# Altium PCB MicroMod_SAMD51.PcbDoc
Units mil, origin at the board's own origin, x right, y up, seen from the top; angles counter-clockwise.
Board outline 866.14 x 866.14 mil, 4 copper layers (Top, PWR_HORIZ, GND-VERT, Bottom), stack 83.073 mil thick; 36 components, 57 nets, 184 pads, 112 vias.
Unrouted connection lines stored in the file: 57.
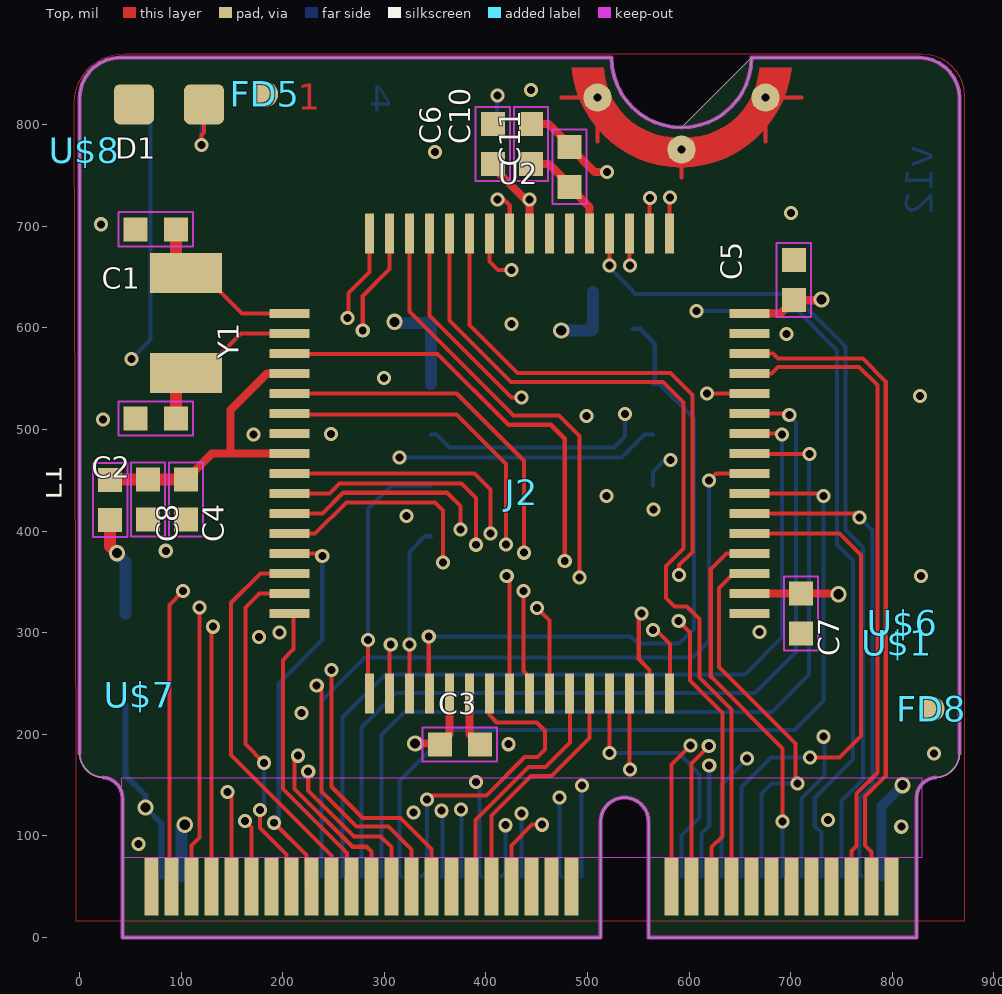
[diagram p0: Top view]
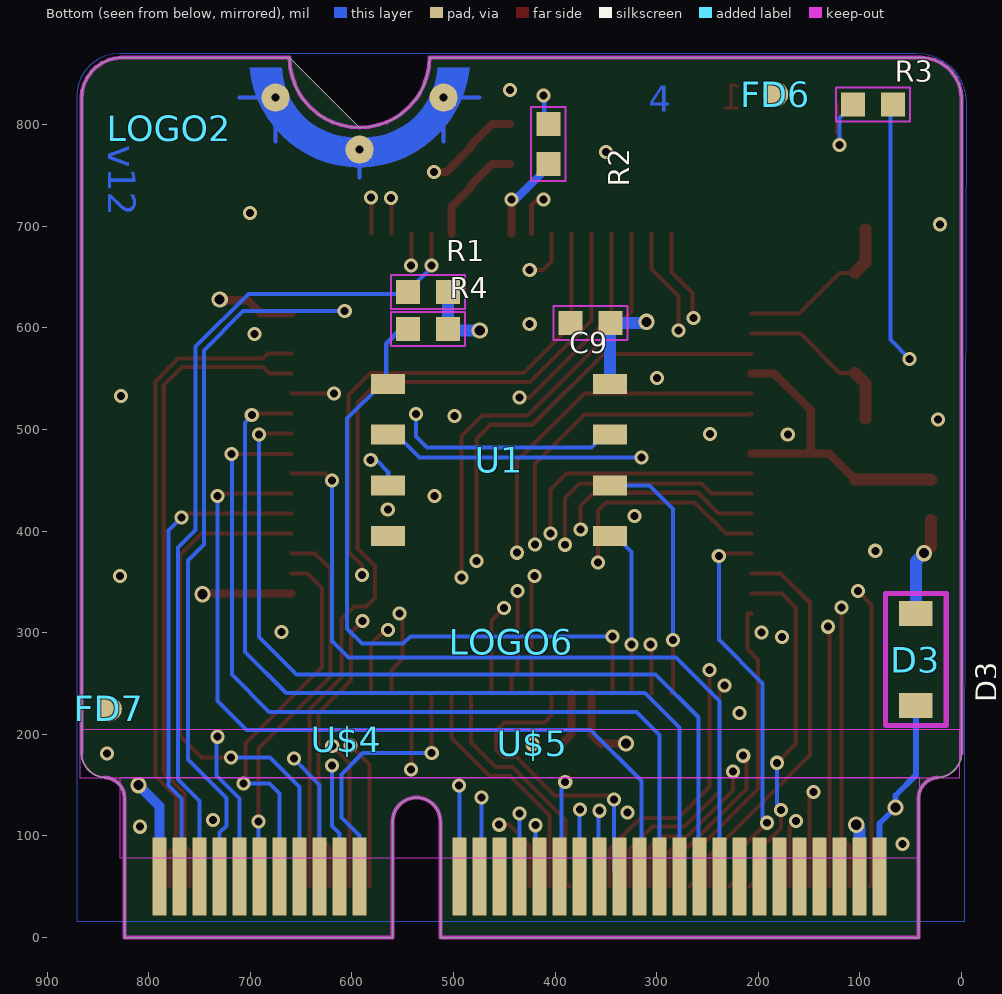
[diagram p1: Bottom view, seen from below]
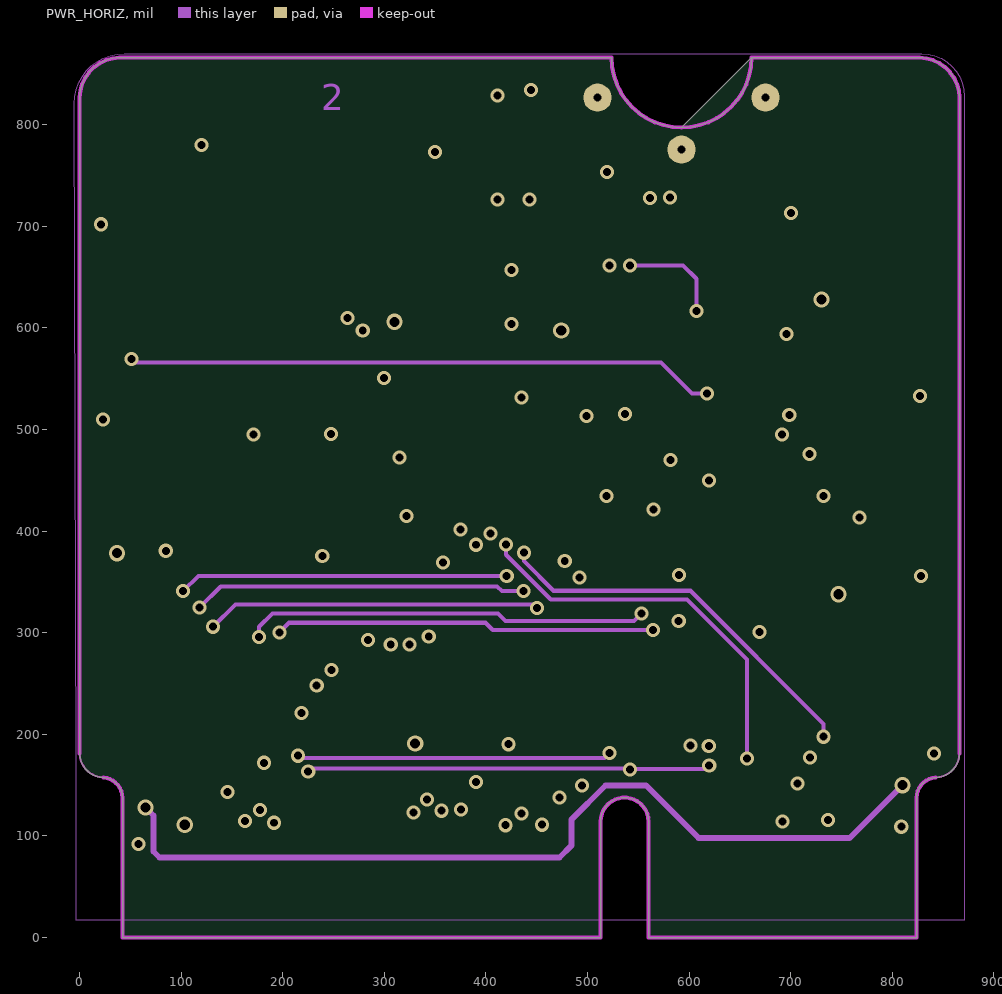
[diagram p2: PWR_HORIZ]
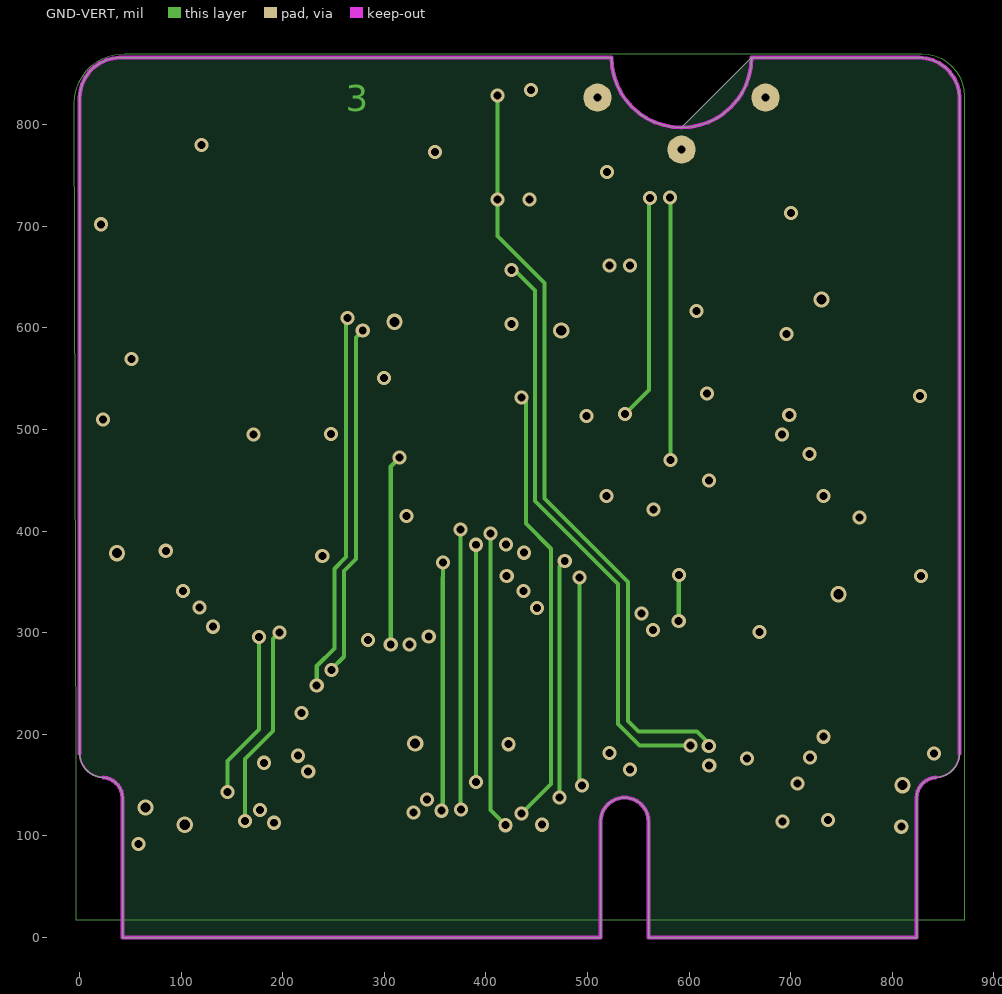
[diagram p3: GND-VERT]

## Layer stack, top to bottom
Top Solder: solder mask 0.4, Solder Resist, Dk 3.5
Top: signal copper 1.378
Dielectric 1: core 59.0551, FR-4, Dk 4.8
PWR_HORIZ: signal copper 1.378
Dielectric3: prepreg 5.9055, FR-4, Dk 4.8
GND-VERT: signal copper 1.378
Dielectric2: dielectric 12.6, FR-4, Dk 4.8
Bottom: signal copper 1.378
Bottom Solder: solder mask 0.4, Solder Resist, Dk 3.5

## Board outline
592.52,797.24 ccw(c592.52,866.14) 661.42,866.14 826.77,866.14 cw(c825.79,825.79) 866.14,826.77 866.14,181.1 cw(c841.84,181.78) 842.52,157.48 ccw(c843.92,137.43) 823.82,137.8 823.82,0 560.04,0 560.04,114.17 ccw(c536.42,114.17) 512.8,114.17 512.8,0 42.32,0 42.32,137.8 ccw(c22.01,137.22) 23.62,157.48 cw(c24.3,181.78) 0,181.1 0,826.77 cw(c40.35,825.79) 39.37,866.14 523.62,866.14 ccw(c592.52,866.14) 592.52,797.24 ccw(c592.52,866.14)

## Design rules (kind name [scope] priority, off if disabled: settings)
BoardOutlineClearance mdCopperDimension [All] p1: gap=10 ignorepadtopadclearanceinfootprint=FALSE except(0: Arc-SplitContinuation Track-SplitContinuation SMDPad-SplitContinuation THPad-SplitContinuation Via-SplitContinuation Fill-SplitContinuation Poly-SplitContinuation Region-SplitContinuation Text-SplitContinuation; 6: Poly-OutlineEdge Poly-CavityEdge Poly-CutoutEdge Poly-SplitBarrior)
Clearance Clearance_for_PolygonClass_Isolate_6 [InPolygonClass('Isolate_6') vs IsArc Or IsTrack Or IsPad Or IsVia Or IsFill Or IsRegion Or IsText] p1: gap=6 ignorepadtopadclearanceinfootprint=FALSE
Clearance "Clearance (Same Net)" [All] p2: gap=4 ignorepadtopadclearanceinfootprint=FALSE
Clearance Clearance_for_NetClass_USB [InNetClass('USB') vs InNetClass('USB')] p3: gap=3 ignorepadtopadclearanceinfootprint=FALSE
Clearance "Clearance_for_NetClass_Clock Signals" [InNetClass('Clock Signals') vs InNetClass('Clock Signals')] p4: gap=8 ignorepadtopadclearanceinfootprint=FALSE
Clearance [All] p5: gap=4 ignorepadtopadclearanceinfootprint=FALSE
HoleSize HoleSize_For_NetClass_USB [InNetClass('USB')] p1: absolutevalues=TRUE maxlimit=0 minlimit=0 maxpercent=80.000 minpercent=20.000
HoleSize "HoleSize_For_NetClass_Clock Signals" [InNetClass('Clock Signals')] p2: absolutevalues=TRUE maxlimit=0 minlimit=0 maxpercent=80.000 minpercent=20.000
HoleSize [All] p3: absolutevalues=TRUE maxlimit=100000 minlimit=7.87 maxpercent=80.000 minpercent=20.000
HoleToHoleClearance mdDrill [All] p1: gap=6 allowstackedmicrovias=TRUE
MinimumSolderMaskSliver [All] p1 off: minsoldermaskwidth=10
PasteMaskExpansion Expansion_SMDPaste_OFF [InPadClass('SMDPaste_OFF')] p1: expansion=0
PasteMaskExpansion mlMinCreamFrame [All] p2: expansion=0
PolygonConnect PolygonConnect_For_PolygonThermal_ON_Width100000_Gap100000 [InPolygonClass('PolygonThermal_ON_Width100000_Gap100000') vs Not IsVia] p1: connectstyle=Relief reliefconductorwidth=10 reliefentries=4 polygonreliefangle="90 Angle" airgapwidth=10
PolygonConnect ThermalVias [IsVia] p2: connectstyle=Direct reliefconductorwidth=10 reliefentries=4 polygonreliefangle="90 Angle" airgapwidth=10
PolygonConnect [All] p3: connectstyle=Relief reliefconductorwidth=10 reliefentries=4 polygonreliefangle="90 Angle" airgapwidth=10
RoutingVias [All] p1: holewidth=7.87 width=13.87 viastyle="Through Hole" minholewidth=7.87 minwidth=13.87 maxholewidth=100 maxwidth=100
SolderMaskExpansion mlMinStopFrame [All] p1: expansion=4 istentingtop=FALSE
Width Width_For_NetClass_USB [InNetClass('USB')] p1: maxlimit=10 minlimit=4 preferedwidth=4
Width "Width_For_NetClass_Clock Signals" [InNetClass('Clock Signals')] p2: maxlimit=10 minlimit=99999 preferedwidth=0 toplayer_minwidth=0 midlayer1_minwidth=0 midlayer14_minwidth=0 bottomlayer_minwidth=0
Width [All] p3: maxlimit=10000 minlimit=4 preferedwidth=4
26 further rules are at their usual default settings.

## Classes and differential pairs
polygon class PolygonThermal_ON_Width100000_Gap100000: Polygon_1_Net_3.3V Polygon_1_Net_GND Polygon_2_Net_GND Polygon_3_Net_GND
polygon class Isolate_6: Polygon_1_Net_3.3V Polygon_1_Net_GND Polygon_2_Net_GND Polygon_3_Net_GND
pad class SMDPaste_OFF: FD5-1 FD6-1 FD7-1 FD8-1 J2-1 J2-2 J2-3 J2-4 J2-5 J2-6 J2-7 J2-8 J2-9 J2-10 J2-11 J2-12 J2-13 J2-14 J2-15 J2-16 J2-17 J2-18 J2-19 J2-20 J2-21 J2-22 J2-23 J2-32 J2-33 J2-34 J2-35 J2-36 J2-37 J2-38 J2-39 J2-40 J2-41 J2-42 J2-43 J2-44 J2-45 J2-46 J2-47 J2-48 J2-49 J2-50 J2-51 J2-52 J2-53 J2-54 J2-55 J2-56 J2-57 J2-58 J2-59 J2-60 J2-61 J2-62 J2-63 J2-64 J2-65 J2-66 J2-67 J2-68 J2-69 J2-70 J2-71 J2-72 J2-73 J2-74 J2-75
net class USB: D+/USBHOST_D+ D-/USBHOST_D-
net class "Clock Signals": SCK SCK1

## Components (designator, comment, footprint, x,y, rotation, side; value= is the part's Value field where it differs from the comment)
C1 "15pF" 0402-TIGHT 75,697.13 r180 top
C2 "15pF" 0402-TIGHT 75,510.91 r180 top
C3 "0.1uF" 0402-TIGHT 374.25,190 r0 top
C4 "10uF" 0402-TIGHT 104.65,431.1 r270 top
C5 "0.1uF" 0402-TIGHT 703,647 r90 top
C6 "0.1uF" 0402-TIGHT 406.7,780.94 r90 top
C7 "0.1uF" 0402-TIGHT 710.08,318.98 r270 top
C8 "10uF" 0402-TIGHT 67.2,431.1 r270 top
C9 "0.1uF" 0402-TIGHT 365,605 r0 bottom
C10 "0.1uF" 0402-TIGHT 444.24,780.91 r90 top
C11 "4.7uF" 0402-TIGHT 482.16,758.62 r90 top
D1 "BLUE" LED-0603 88,820 r180 top
D3 "1A/23V/620mV" SOD-323 45,273.62 r270 bottom
FD5 "" FIDUCIAL-MICRO 183,830 r0 top
FD6 "" FIDUCIAL-MICRO 183,830 r180 bottom
FD7 "" FIDUCIAL-MICRO 839,225 r180 bottom
FD8 "" FIDUCIAL-MICRO 839,225 r0 top
FRAME2 "" CREATIVE_COMMONS -300,-550 r0 top
J2 "" M.2-CARD-E-22 435,0 r0 top
L1 "30Ω" 0402-TIGHT 30.19,430.69 r90 top
LOGO2 "" OSHW-LOGO-MINI 779.69,796.77 r180 bottom
LOGO5 "" ORDERING_INSTRUCTIONS 1200,2000 r0 top
LOGO6 "" SFE_LOGO_NAME_.1 443.32,291.22 r180 bottom
R1 "10k" 0402-TIGHT 525,635.47 r180 bottom
R2 "1k" 0402-TIGHT 406.73,780.94 r270 bottom
R3 "1k" 0402-TIGHT 87,820 r180 bottom
R4 "100k" 0402-TIGHT 525,599.09 r180 bottom
U1 "" WSON-8-6X5-NO_CENTERPAD 455,470 r180 bottom
U2 "ATSAMD51J20A-A" TQFP64 433.07,466.54 r270 top
U$1 "" MICROMOD_MI_LOGO_.35 805,290 r90 top
U$4 "" MICROMOD_LOGO_.35 605,195 r180 bottom
U$5 "" SAMD510 422.24,191.22 r180 bottom
U$6 "" SAMD510 810,310 r90 top
U$7 "" SFE_LOGO_FLAME_.1 59.25,238.78 r0 top
U$8 "" STAT0 5,775 r0 top
Y1 "32.768kHz" CRYSTAL-SMD-3.2X1.5MM 105,605 r270 top

## Footprints (in the part's own frame and the unit in brackets; to place one, negate y for a bottom-side part, rotate by r counter-clockwise, add the part's x,y. Pads: shape width x height; smd on the part's side, far side on the other; paste and mask are expansions set on the pad)
0402-TIGHT [mil] "0402-TIGHT"
  rect 23.62x23.62 smd: 1(-19.69,0) 2(19.69,0)
  Top keep-out lines w1.97: 36.46,16.78 36.46,-16.78 -36.46,-16.78 -36.46,16.78 36.46,16.78
  body extent -38,-18 38,18, height 150
CREATIVE_COMMONS [mil] "CREATIVE_COMMONS"
CRYSTAL-SMD-3.2X1.5MM [mm] "CRYSTAL-SMD-3.2X1.5MM"
  rect 1x1.8 smd: P$1(-1.25,0) P$2(1.25,0)
  body extent -1.75,-0.9 1.75,0.9, height 3.81
FIDUCIAL-MICRO [mil] "FIDUCIAL-MICRO"
  rrect100% 25x25 smd paste+0: 1(0,0)
  body extent -13,-13 13,13, height 50
LED-0603 [mm] "LED-0603"
  rrect30% 1x1 smd: A(-0.877,0) C(0.877,0)
  body extent -1.39,-0.54 1.39,0.54, height 3.81
M.2-CARD-E-22 [mm] "M.2-CARD-E-22"
  rect 0.35x1.45 smd paste+0: 1(9.25,1.275) 3(8.75,1.275) 5(8.25,1.275) 7(7.75,1.275) 9(7.25,1.275) 11(6.75,1.275) 13(6.25,1.275) 15(5.75,1.275) 17(5.25,1.275) 19(4.75,1.275) 21(4.25,1.275) 23(3.75,1.275) 33(1.25,1.275) 35(0.75,1.275) 37(0.25,1.275) 39(-0.25,1.275) 41(-0.75,1.275) 43(-1.25,1.275) 45(-1.75,1.275) 47(-2.25,1.275) 49(-2.75,1.275) 51(-3.25,1.275) 53(-3.75,1.275) 55(-4.25,1.275) 57(-4.75,1.275) 59(-5.25,1.275) 61(-5.75,1.275) 63(-6.25,1.275) 65(-6.75,1.275) 67(-7.25,1.275) 69(-7.75,1.275) 71(-8.25,1.275) 73(-8.75,1.275) 75(-9.25,1.275)
  rect 0.35x1.95 smd far side paste+0: 2(9,1.525) 4(8.5,1.525) 6(8,1.525) 8(7.5,1.525) 10(7,1.525) 12(6.5,1.525) 14(6,1.525) 16(5.5,1.525) 18(5,1.525) 20(4.5,1.525) 22(4,1.525) 32(1.5,1.525) 34(1,1.525) 36(0.5,1.525) 38(0,1.525) 40(-0.5,1.525) 42(-1,1.525) 44(-1.5,1.525) 46(-2,1.525) 48(-2.5,1.525) 50(-3,1.525) 52(-3.5,1.525) 54(-4,1.525) 56(-4.5,1.525) 58(-5,1.525) 60(-5.5,1.525) 62(-6,1.525) 64(-6.5,1.525) 66(-7,1.525) 68(-7.5,1.525) 70(-8,1.525) 72(-8.5,1.525) 74(-9,1.525)
  round 0.708 hole 0.2: GND1(1.9,21) GND2(4,19.7) GND3(6.1,21)
  Top region: 1.25,21.75 2.05,21.75 2.229,21.05 2.663,20.471 3.284,20.103 4,20 4,20 4.716,20.103 5.337,20.471 5.771,21.05 5.95,21.75 5.95,21.75 6.75,21.75 6.292,20.488 5.299,19.586 4,19.25 4,19.25 2.697,19.579 1.702,20.484 1.25,21.75 1.25,21.75
  Top lines w0.102: 1,21 1.9,21 1.9,19.9 ; 4,19 4,19.7 ; 6.1,19.9 6.1,21 7,21
  Top keep-out region: 10,4 10,2 -10,2 -10,4
  Bottom region: 6.75,21.75 5.95,21.75 5.771,21.05 5.337,20.471 4.716,20.103 4,20 4,20 3.284,20.103 2.663,20.471 2.229,21.05 2.05,21.75 2.05,21.75 1.25,21.75 1.707,20.488 2.701,19.586 4,19.25 4,19.25 5.303,19.579 6.298,20.484 6.75,21.75 6.75,21.75
  Bottom lines w0.102: 1,21 1.9,21 1.9,19.9 ; 4,19 4,19.7 ; 6.1,19.9 6.1,21 7,21
  Bottom keep-out region: 11,5.2 11,4 -11,4 -11,5.2
  Bottom keep-out region: 10,4 10,2 -10,2 -10,4
  body extent -10.31,0.54 10.71,22, height 3.81
MICROMOD_LOGO_.35 [mil] "MICROMOD_LOGO_.35"
MICROMOD_MI_LOGO_.35 [mil] "MICROMOD_MI_LOGO_.35"
ORDERING_INSTRUCTIONS [mil] "ORDERING_INSTRUCTIONS"
  body extent -4,-2004 4004,4, height 150
OSHW-LOGO-MINI [mil] "OSHW-LOGO-MINI"
SAMD510 [mil] "SAMD510"
SFE_LOGO_FLAME_.1 [mil] "SFE_LOGO_FLAME_.1"
SFE_LOGO_NAME_.1 [mil] "SFE_LOGO_NAME_.1"
SOD-323 [mil] "SOD-323"
  rect 24.8x32.68 smd: A(45.28,0) C(-45.28,0)
  Top keep-out lines w5: 65,30 65,-30 -65,-30 -65,30 65,30
  body extent -68,-33 68,33, height 150
STAT0 [mil] "STAT0"
TQFP64 [mm] "TQFP64"
  rect 0.22x1 smd: 1(-3.75,-5.75) 2(-3.25,-5.75) 3(-2.75,-5.75) 4(-2.25,-5.75) 5(-1.75,-5.75) 6(-1.25,-5.75) 7(-0.75,-5.75) 8(-0.25,-5.75) 9(0.25,-5.75) 10(0.75,-5.75) 11(1.25,-5.75) 12(1.75,-5.75) 13(2.25,-5.75) 14(2.75,-5.75) 15(3.25,-5.75) 16(3.75,-5.75) 33(3.75,5.75) 34(3.25,5.75) 35(2.75,5.75) 36(2.25,5.75) 37(1.75,5.75) 38(1.25,5.75) 39(0.75,5.75) 40(0.25,5.75) 41(-0.25,5.75) 42(-0.75,5.75) 43(-1.25,5.75) 44(-1.75,5.75) 45(-2.25,5.75) 46(-2.75,5.75) 47(-3.25,5.75) 48(-3.75,5.75)
  rect 1x0.22 smd: 17(5.75,-3.75) 18(5.75,-3.25) 19(5.75,-2.75) 20(5.75,-2.25) 21(5.75,-1.75) 22(5.75,-1.25) 23(5.75,-0.75) 24(5.75,-0.25) 25(5.75,0.25) 26(5.75,0.75) 27(5.75,1.25) 28(5.75,1.75) 29(5.75,2.25) 30(5.75,2.75) 31(5.75,3.25) 32(5.75,3.75) 49(-5.75,3.75) 50(-5.75,3.25) 51(-5.75,2.75) 52(-5.75,2.25) 53(-5.75,1.75) 54(-5.75,1.25) 55(-5.75,0.75) 56(-5.75,0.25) 57(-5.75,-0.25) 58(-5.75,-0.75) 59(-5.75,-1.25) 60(-5.75,-1.75) 61(-5.75,-2.25) 62(-5.75,-2.75) 63(-5.75,-3.25) 64(-5.75,-3.75)
  body extent -6.25,-6.25 6.25,6.25, height 3.81
WSON-8-6X5-NO_CENTERPAD [mil] "WSON-8-6X5-NO_CENTERPAD"
  rect 33.46x19.69 smd: 1(-109.25,75) 2(-109.25,25) 3(-109.25,-25) 4(-109.25,-75) 5(109.25,-75) 6(109.25,-25) 7(109.25,25) 8(109.25,75)
  body extent -126,-85 126,85, height 50

## Part data
C1 C2 C3 C4 C5 C6 C7 C8 C9 C10 C11 L1 R1 R2 R3 R4: library part 0402-TIGHT, PackageName=0402-TIGHT
D1: library part LED-0603, PackageName=LED-0603
D3: library part SOD-323, PackageName=SOD-323
FD5 FD6 FD7 FD8: library part FIDUCIAL-MICRO, PackageName=FIDUCIAL-MICRO
FRAME2: library part CREATIVE_COMMONS, PackageName=CREATIVE_COMMONS
J2: library part M.2-CARD-E-22, PackageName=M.2-CARD-E-22
LOGO2: library part OSHW-LOGO-MINI, PackageName=OSHW-LOGO-MINI
LOGO5: library part ORDERING_INSTRUCTIONS, PackageName=ORDERING_INSTRUCTIONS
LOGO6: library part SFE_LOGO_NAME_.1, PackageName=SFE_LOGO_NAME_.1
U1: library part WSON-8-6X5-NO_CENTERPAD, PackageName=WSON-8-6X5-NO_CENTERPAD
U2: library part TQFP64, PackageName=TQFP64
U$1: library part MICROMOD_MI_LOGO_.35, PackageName=MICROMOD_MI_LOGO_.35
U$4: library part MICROMOD_LOGO_.35, PackageName=MICROMOD_LOGO_.35
U$5 U$6: library part SAMD510, PackageName=SAMD510
U$7: library part SFE_LOGO_FLAME_.1, PackageName=SFE_LOGO_FLAME_.1
U$8: library part STAT0, PackageName=STAT0
Y1: library part CRYSTAL-SMD-3.2X1.5MM, PackageName=CRYSTAL-SMD-3.2X1.5MM

## Via types
v1: diameter 13.87/13.87/13.87/13.87 (per signal layer), hole 7.87, Top to Bottom, 103 vias
v2: diameter 16/16/16/16 (per signal layer), hole 10, Top to Bottom, 9 vias

## Nets (pads, with @x,y where several pads share a name; then routed paths per layer and width w, separated by ;. In a path a pad name is that pad's centre, name@x,y a point inside that pad or via, vN(x,y) a via of type N, cw(c..) or ccw(c..) an arc to the next point about the centre after c; other vN are vias at no path point)
3.3V: C3.1 C5.1 C6.1 C7.1 C9.1 D3.C J2.72 L1.1 R1.2 R2.2 R4.2 U1.8 U2.21 U2.34 U2.48 U2.56 | length 695.9
  Top w8: v2(330.3,191.06) 353.5,191.06 C3.1 364.17,199.61 U2.21 ; C6.1@406.7,761.26 406.7,758.5 438.04,727.17 442.13,727.17 v1(442.91,726.38) U2.56 ; U2.34 710,338.58 C7.1 746.39,338.66 v2(747.09,337.97) ; U2.48 689.86,614.17 C5.1 729.41,627.32 v2(730.16,628.06)
  Top w11.81: L1.1 30.19,384.96 v2(36.81,378.34)
  Bottom w8: R2.2@406.73,761.26 406.73,758.5 438.86,726.38 v1(442.91,726.38)
  Bottom w11.81: v2(36.81,378.34) 45,370.15 D3.C ; J2.72 100.35,107.83 v2(103.54,111.02) ; v2(310,606) 311,605 C9.1 345.75,604.57 U1.8 ; v2(474.15,597.57) 503.79,597.57 R4.2 R1.2
3.3V_EN: J2.4 U2.38 | length 474.5
  Top w4: U2.38 763.78,417.32 v1(767.72,413.39)
  Bottom w4: v1(767.72,413.39) 780.32,400.79 780.32,149.61 767.72,137.01 767.72,61.97 J2.4
3.3V_IN: D3.A J2.2 J2.74 | length 1155
  PWR_HORIZ w5.91: v2(64.96,127.95) 72.83,120.08 72.83,84.65 78.74,78.74 472.44,78.74 484.09,90.39 484.09,115.98 517.72,149.61 557.76,149.61 609.33,98.03 758.03,98.03 v2(810,150)
  Bottom w5.91: D3.A@45,228.35 45,159.72 64.96,139.76 v2(64.96,127.95) 80.67,112.24 J2.74
  Bottom w10: J2.2 789.33,129.33 v2(810,150)
!CS: J2.55 U2.16 | length 304.7
  Top w4: U2.16 210.54,318.9 210.54,283.6 209.76,282.81 200.31,273.36 200.31,146.15 263.35,83.11 263.35,54.53 J2.55
!CS1!: R4.1 U1.1 U2.20 | length 656.1
  Top w4: v1(343.7,296.46) 343.7,240.94 U2.20
  Bottom w4: v1(343.7,296.46) 542.52,296.46 549.61,289.37 590.16,289.37 604.72,303.94 604.72,510.83 570.55,545 U1.1
  Bottom w4.5: R4.1 551.77,599.09 566.25,584.61 566.25,547 U1.1
!HOLD!: U1.7 U2.50 | length 481.1
  Top w4: U2.50 561.02,727.56 v1(561.42,727.95)
  GND-VERT w4: v1(537.01,515.35) 560.63,538.98 560.63,727.17 v1(561.42,727.95)
  Bottom w4: U1.7 351.46,495 364.17,482.28 525.98,482.28 537.01,493.31 v1(537.01,515.35)
!RESET: J2.6 R1.1 U2.52 | length 836
  Top w4: v1(521.65,661.42) U2.52
  Bottom w4: v1(521.65,661.42) 521.65,659.45 544.68,636.42 R1.1 546.65,633.5 701.97,633.5 753.94,581.54 753.94,401.18 771.22,383.9 771.22,155.59 749.96,134.33 J2.6
!WP!: U1.3 U2.49 | length 329.5
  Top w4: U2.49 580.71,727.95 v1(581.1,728.35)
  GND-VERT w4: v1(581.1,728.35) 581.5,727.95 v1(581.5,470.08)
  Bottom w4: U1.3 564.25,458.39 575.94,470.08 v1(581.5,470.08)
A0/DAC: J2.34 U2.3 | length 739.4
  Top w4: U2.3 207.09,574.41 352.36,574.41 422.05,504.72 463.78,504.72 477.56,490.94 v1(477.56,370.47)
  GND-VERT w4: v1(472.44,137.8) 472.44,365.35 v1(477.56,370.47)
  Bottom w4: v1(472.44,137.8) 472.44,61.97 J2.34
A1: J2.38 U2.61 | length 700.3
  Top w4: U2.61 344.49,612.2 425.2,531.5 v1(435.04,531.5)
  GND-VERT w4: v1(435.07,122.13) 464.17,151.24 464.17,382.68 439.37,407.48 439.37,527.17 v1(435.04,531.5)
  Bottom w4: J2.38 435,122.13 v1(435.07,122.13)
A2/PWM0: J2.32 U2.62 | length 730.6
  Top w4: U2.62 324.8,616.14 427.17,513.78 472.05,513.78 492.13,493.7 v1(492.13,354.33)
  GND-VERT w4: v1(492.13,354.33) 492.13,152.36 v1(494.69,149.8)
  Bottom w4: J2.32 494.06,147.2 495.67,148.82 v1(494.69,149.8)
A3/PWM1: J2.47 U2.63 | length 728.8
  Top w4: v1(248.03,263.39) 248.03,148.43 278.74,117.72 315.75,117.72 346.42,87.05 J2.47 ; v1(278.74,597.64) 278.74,631.5 305.12,657.87 U2.63
  GND-VERT w4: v1(248.03,263.39) 248.03,264.17 260.24,276.38 260.24,360.63 272.05,372.44 272.05,590.55 278.74,597.24 v1(278.74,597.64)
A4: J2.49 U2.64 | length 721.3
  Top w4: v1(233.46,248.03) 238.19,243.31 238.19,143.7 272.44,109.45 303.94,109.45 326.73,86.65 J2.49 ; v1(263.78,609.84) 264.57,610.63 264.57,634.25 285.43,655.12 U2.64
  GND-VERT w4: v1(233.46,248.03) 233.46,267.32 250.79,284.65 250.79,362.99 262.2,374.41 262.2,608.27 v1(263.78,609.84)
CIPO: J2.61 U2.15 | length 345.9
  Top w4: v1(177.68,125.68) 177.68,107.95 203.9,81.73 203.9,54.92 J2.61 ; v1(181.55,172.03) 163.16,190.43 163.16,324.85 176.89,338.58 U2.15
  Bottom w4: v1(177.68,125.68) 181.55,129.54 v1(181.55,172.03)
CIPO1: U1.5 U2.19 | length 166.7
  Top w4: U2.19 v1(324.8,288.58)
  Bottom w4: v1(324.8,288.58) 324.8,379.57 340.24,395 U1.5
COPI: J2.59 U2.13 | length 393.5
  Top w4: v1(191.34,112.99) 223.19,81.14 223.19,55.32 J2.59 ; U2.13 236.43,377.95 v1(238.9,375.48)
  Bottom w4: v1(191.34,112.99) 196.06,117.72 196.06,250.28 238.9,293.12 v1(238.9,375.48)
COPI1: U1.2 U2.18 | length 495
  Top w4: U2.18 305.12,287.4 v1(306.3,288.58)
  GND-VERT w4: v1(306.3,288.58) 306.3,463.78 v1(314.96,472.44)
  Bottom w4: v1(314.96,472.44) 533.43,472.44 555.98,495 U1.2
D0: J2.10 U2.5 | length 878
  Top w4: U2.5 371.26,535.43 437.4,469.29 v1(437.4,378.74)
  PWR_HORIZ w4: v1(437.4,378.74) 437.4,370.47 466.54,341.34 601.18,341.34 732.28,210.24 v1(732.28,197.64)
  Bottom w4: J2.10 710.63,60.08 710.63,137.01 733.07,159.45 733.07,196.85 v1(732.28,197.64)
D1: J2.18 U2.6 | length 827.1
  Top w4: U2.6 207.48,514.96 370.87,514.96 419.69,466.14 v1(419.69,387.01)
  PWR_HORIZ w4: v1(419.69,387.01) 419.69,376.77 463.78,332.68 598.03,332.68 657.09,273.62 v1(657.09,176.38)
  Bottom w4: J2.18 631.85,150.35 657.09,175.59 v1(657.09,176.38)
D2/G0: J2.40 U2.9 | length 593
  Top w4: U2.9 388.58,456.69 404.41,440.87 v1(404.41,397.56)
  GND-VERT w4: v1(404.41,397.56) 404.41,125.52 v1(419.37,110.56)
  Bottom w4: J2.40 419.37,64.09 v1(419.37,110.56)
D3/G1: J2.42 U2.10 | length 568.4
  Top w4: U2.10 246.06,437.01 255.91,446.85 375.98,446.85 390.16,432.68 v1(390.16,386.61)
  GND-VERT w4: v1(390.06,153.25) 390.06,156.01 390.16,156.11 v1(390.16,386.61)
  Bottom w4: v1(390.06,153.25) 393.7,149.61 393.7,61.97 J2.42
D4/G2: J2.44 U2.11 | length 547.2
  Top w4: U2.11 238.98,417.32 259.45,437.8 361.81,437.8 374.8,424.8 v1(374.8,401.57)
  GND-VERT w4: v1(374.8,401.57) 374.8,126.77 v1(375.59,125.98)
  Bottom w4: v1(375.59,125.98) 375.94,125.63 J2.44
D5/G3: J2.46 U2.12 | length 529.7
  Top w4: U2.12 231.89,397.64 262.6,428.35 350,428.35 357.87,420.47 v1(357.87,369.29)
  GND-VERT w4: v1(356.22,124.81) 357.48,124.81 357.48,354.33 357.87,354.72 v1(357.87,369.29)
  Bottom w4: v1(356.22,124.81) 357.09,123.94 357.09,60.87 J2.46
D6/G4: J2.48 U2.23 | length 315.5
  Top w4: v1(342.13,135.83) 346.06,139.76 400.39,139.76 438.19,177.56 450.79,177.56 458.27,185.04 458.27,203.54 450,211.81 410.63,211.81 403.54,218.9 U2.23
  Bottom w4: J2.48 342.13,65.59 v1(342.13,135.83)
D7/G5: J2.73 U2.24 | length 738.7
  Top w4: J2.73 88.54,52.17 88.54,327.52 v1(101.97,340.94) ; v1(420.47,355.91) 423.23,353.15 U2.24
  PWR_HORIZ w4: v1(101.97,340.94) 116.93,355.91 v1(420.47,355.91)
D8/G6: J2.71 U2.25 | length 710.6
  Top w4: J2.71 110.2,90.51 118.11,98.43 v1(118.11,324.8) ; v1(437.01,340.94) 437.01,262.2 442.91,256.3 U2.25
  PWR_HORIZ w4: v1(118.11,324.8) 138.98,345.67 411.02,345.67 415.75,340.94 v1(437.01,340.94)
D9/G7: J2.69 U2.26 | length 675.2
  Top w4: J2.69 129.88,304.29 v1(131.5,305.91) ; v1(450.39,324.41) 462.6,312.2 U2.26
  PWR_HORIZ w4: v1(131.5,305.91) 153.54,327.95 446.85,327.95 v1(450.39,324.41)
D10: J2.67 U2.31 | length 742.5
  Top w4: v1(145.67,143.31) 149.57,139.41 J2.67 ; v1(553.15,318.9) 550.39,316.14 550.39,274.02 561.02,263.39 U2.31
  PWR_HORIZ w4: v1(176.77,295.67) 176.77,305.91 189.76,318.9 411.81,318.9 419.29,311.42 545.67,311.42 v1(553.15,318.9)
  GND-VERT w4: v1(145.67,143.31) 145.67,173.62 176.77,204.72 v1(176.77,295.67)
D11: J2.65 U2.32 | length 712.6
  Top w4: v1(162.99,114.57) 169.25,108.31 J2.65 ; v1(564.57,302.76) 567.32,302.76 581.1,288.98 581.1,240.55 U2.32
  PWR_HORIZ w4: v1(196.85,300.39) 206.3,309.84 399.61,309.84 406.69,302.76 v1(564.57,302.76)
  GND-VERT w4: v1(162.99,114.57) 162.99,175.59 190.55,203.15 190.55,294.09 v1(196.85,300.39)
D13: R3.2 U2.44 | length 882
  Top w4: v1(617.72,535.43) U2.44
  PWR_HORIZ w4: v1(51.03,569.56) 54.64,565.95 572.44,565.95 602.96,535.43 v1(617.72,535.43)
  Bottom w4: v1(51.03,569.56) 70,588.53 70,817.32 R3.2
D38: J2.43 U2.27 | length 240
  Top w4: J2.43 389.76,54.17 389.76,115.76 442,168 458.65,168 482.72,192.08 482.72,239.72 U2.27
D39: J2.41 U2.28 | length 241.8
  Top w4: J2.41 405.47,120.08 444.4,159 464.61,159 501.97,196.35 U2.28
D+/USBHOST_D+: J2.3 U2.46 | length 653.8
  Top w4: U2.46 682.48,574.8 687.48,569.8 771.02,569.8 793.49,547.34 793.49,159.2 772.91,138.62 772.91,90.59 779.49,84.02 J2.3
D-/USBHOST_D-: J2.5 U2.45 | length 639.9
  Top w4: U2.45 680.91,555.12 687.43,561.64 767.28,561.64 785.18,543.73 785.18,162.21 764.8,141.83 764.8,90.2 759.8,85.2 J2.5
GND: C1.2 C2.2 C3.2 C4.2 C5.2 C6.2 C7.2 C8.2 C9.2 C10.2 C11.2 D1.C J2.1 J2.7 J2.33 J2.36 J2.39 J2.45 J2.75 J2.GND1 J2.GND2 J2.GND3 U1.4 U2.7 U2.22 U2.33 U2.47 U2.54 | length 226.8
  Top w4: J2.39 425.16,90.67 445.55,111.06 v1(455,111.06)
  Top w8: U2.22 383.86,200.08 C3.2 ; C10.2 461.83,800.6 C11.2@482.16,780.28 ; C11.2 506.83,753.63 v1(519.28,753.63)
  other v1: 58,92.19 808.77,109.09 736.72,115.79 328.62,123.27 841,181 422.38,190.28 218.32,220.84 669.25,300.87 828.18,355.68 84.86,380.69 321.87,414.94 564.72,421.17 518.72,434.62 171.02,495.28 247.56,495.7 23.09,509.73 499.03,513.36 827.39,532.84 299.82,550.76 696,593.88 425,604 21.02,702.05 700.23,713.16 349.99,773.32 444.48,834.34
HOST_ENABLE: J2.8 U2.51 | length 831.7
  Top w4: U2.51 541.34,661.81 v1(541.73,661.42)
  PWR_HORIZ w4: v1(541.73,661.42) 594.09,661.42 607.09,648.43 v1(607.09,616.54)
  Bottom w4: v1(607.09,616.54) 707.09,616.54 745.67,577.95 745.67,387.01 761.42,371.26 761.42,175.2 723.62,137.4 723.62,109.84 730.28,103.19 J2.8
I2C_!INT!: J2.16 U2.37 | length 523.2
  Top w4: U2.37 748.03,397.64 769.29,376.38 769.29,198.43 748.03,177.17 v1(718.9,177.17)
  Bottom w4: J2.16 651.54,147.99 680.71,177.17 v1(718.9,177.17)
I2S_CLK: J2.50 U2.39 | length 820.6
  Top w4: U2.39 729.92,437.01 v1(732.28,434.65)
  Bottom w4: J2.50 314.96,61.97 314.96,154.33 364.96,204.33 703.94,204.33 732.28,232.68 v1(732.28,434.65)
I2S_FS: J2.52 U2.41 | length 861.4
  Top w4: U2.41 659.84,475.98 v1(718.5,475.98)
  Bottom w4: J2.52 297.2,199.2 320,222 681.37,222 718.11,258.74 718.11,475.59 v1(718.5,475.98)
I2S_MCLK: J2.58 U2.40 | length 779.4
  Top w4: v1(619.68,450) 626.38,456.69 U2.40
  Bottom w4: J2.58 238.15,232.64 281.1,275.59 603.54,275.59 619.68,291.73 v1(619.68,450)
I2S_SDI: J2.54 U2.43 | length 880.6
  Top w4: U2.43 697.07,515.75 v1(698.54,514.28)
  Bottom w4: J2.54 277.52,206.52 311.61,240.61 664.62,240.61 705.12,281.1 705.12,506.91 698.54,513.49 v1(698.54,514.28)
I2S_SDO: J2.56 U2.42 | length 854.2
  Top w4: U2.42 690.44,496.06 v1(691.41,495.09)
  Bottom w4: J2.56 258.83,61.04 258.83,216.83 301,259 654.75,259 691.41,295.66 v1(691.41,495.09)
N$1: D1.A R3.1 | length 86.6
  Top w4: v1(120,780) 120,790 122.53,792.53 D1.A
  Bottom w4: R3.1 120,806.68 v1(120,780)
RXI: J2.19 U2.59 | length 849.4
  Top w4: U2.59 383.86,602.76 431.1,555.51 581.5,555.51 603.15,533.86 603.15,379.53 590.16,366.54 v1(590.16,356.69) ; v1(589.76,311.42) 600.79,300.39 600.79,253.06 632.69,221.15 632.69,99.69 622.01,89.01 J2.19
  GND-VERT w4: v1(589.76,311.42) 589.76,356.3 v1(590.16,356.69)
SCK: J2.57 U2.14 | length 389.6
  Top w4: U2.14 177.95,358.27 149.21,329.53 149.21,179.66 247.99,80.88 J2.57
SCK1: U1.6 U2.17 | length 253.7
  Top w4: v1(283.86,292.91) 283.86,241.73 U2.17
  Bottom w4: v1(283.86,292.91) 283.86,421.65 307.2,445 U1.6
SCL: J2.14 U2.35 | length 382.6
  Top w4: U2.35 643.7,358.27 629.53,344.09 629.53,266.14 704.72,190.94 704.72,151.57 v1(706.69,151.57)
  Bottom w4: J2.14 671.22,141.69 681.1,151.57 v1(706.69,151.57)
SCL1/TX2: J2.22 J2.53 U2.29 | length 743.4
  Top w4: v1(214.83,178.98) 211.69,175.83 211.69,146.19 268.5,89.37 282.64,89.37 287.36,84.65 J2.53 ; v1(521.43,181.55) 521.65,181.78 U2.29
  PWR_HORIZ w4: v1(214.83,178.98) 217.14,176.68 516.55,176.68 v1(521.43,181.55)
  Bottom w4: v1@521.44,181.54 589.33,181.54 610.24,160.63 610.24,118.11 592.48,100.35 J2.22
SDA: J2.12 U2.36 | length 376.9
  Top w4: U2.36 636.54,377.95 621.28,362.7 621.28,256.72 691.97,186.03 v1(691.97,114.09)
  Bottom w4: J2.12 691.97,61.1 v1(691.97,114.09)
SDA1/RX2: J2.20 J2.51 U2.30 | length 747.8
  Top w4: v1(225.07,163.43) 225.07,144.61 270.08,99.61 296.37,99.61 307.05,88.93 J2.51 ; U2.30 541.34,165.76 v1(541.65,165.45)
  PWR_HORIZ w4: v1(225.07,163.43) 227.88,166.24 540.86,166.24 v1(541.65,165.45) 542.06,165.86 616.21,165.86 v1(619.76,169.41)
  Bottom w4: J2.20 612.17,102.32 619.76,109.91 v1(619.76,169.41)
SWDCK: J2.21 R2.1 U2.57 | length 977.1
  Top w4: J2.21 602.32,171.5 v1(619.32,188.5)
  Top w4.5: v1(411.54,726.46) 417.44,726.46 423.23,720.67 U2.57
  GND-VERT w4: v1(411.42,828.74) 411.54,828.62 v1(411.54,726.46) 411.54,690.4 457.69,644.24 457.69,432.31 540,350 540,213 550.32,202.68 607.51,202.68 619.32,190.87 v1(619.32,188.5)
  Bottom w4: R2.1 410.67,804.57 410.67,827.99 v1(411.42,828.74)
SWDIO: J2.23 U2.58 | length 771.1
  Top w4: U2.58 403.54,665.46 412.01,657 v1(425,657) ; J2.23 582.64,170.36 v1(601.23,188.95)
  GND-VERT w4: v1(425,657) 428,657 448.3,636.7 448.3,429.7 530,348 530,210 551.05,188.95 v1(601.23,188.95)
TXO: J2.17 U2.60 | length 866.8
  Top w4: U2.60 364.17,607.48 424.8,546.85 574.41,546.85 594.49,526.77 594.49,383.07 577.17,365.75 577.17,334.25 585.43,325.98 597.64,325.98 610.24,313.39 610.24,255.91 641.69,224.45 J2.17
VCC: C10.1 C11.1 U2.53 | length 102.6
  Top w8: C10.1 461.95,761.23 482.16,741.02 C11.1 501.97,719.13 U2.53
VDDA: C4.1 C8.1 L1.2 U2.4 U2.8 | length 303.5
  Top w8: C4.1 130.24,476.38 147.64,476.38 ; U2.8 147.64,476.38 ; U2.4 184.45,555.12 148.43,519.1 148.43,477.17 147.64,476.38
  Top w11.81: L1.2 30.61,450.79 C8.1 C4.1
XIN32: C1.1 U2.1 Y1.P$1 | length 165.5
  Top w4: Y1.P$1 120,654.21 160.04,614.17 U2.1
  Top w11.81: C1.1 94.69,664.53 Y1.P$1
XOUT32: C2.1 U2.2 Y1.P$2 | length 166.9
  Top w4: Y1.P$2 120,555.79 158.7,594.49 U2.2
  Top w11.81: C2.1 94.69,545.47 Y1.P$2
pads on no net: FD5.1 FD6.1 FD7.1 FD8.1 J2.9 J2.11 J2.13 J2.15 J2.35 J2.37 J2.60 J2.62 J2.63 J2.64 J2.66 J2.68 J2.70 U2.55

## Polygon pours and split planes (outlines as drawn)
3.3V on PWR_HORIZ "Polygon_1_Net_3.3V" (solid, remove dead copper, pour order 1): -5.29,820.7 cw(c44,820.71) 44,870 829,870 cw(c829,828) 871,828 871,17 -3.38,17 -3.38,164.99
GND on Top "Polygon_1_Net_GND" (solid, remove dead copper, pour order 3): -5.29,820.7 cw(c44,820.71) 44,870 829,870 cw(c829,828) 871,828 871,16 -3.38,16 -3.38,164.99
GND on Bottom "Polygon_2_Net_GND" (solid, remove dead copper, pour order 2): -5.29,820.7 cw(c44,820.71) 44,870 829,870 cw(c829,828) 871,828 871,16 -3.38,16 -3.38,164.99
GND on GND-VERT "Polygon_3_Net_GND" (solid, remove dead copper, pour order 0): -5.29,820.7 cw(c44,820.71) 44,870 829,870 cw(c829,828) 871,828 871,17 -3.38,17 -3.38,164.99

## Keep-outs
Keep-Out Layer:
  the board outline again, w4

## Other copper
Top:
  text "1" at 215,815 h25.5
PWR_HORIZ:
  text "2" at 237.83,814.21 h25.5
GND-VERT:
  text "3" at 261.85,813.43 h25.5
Bottom:
  text "4" at 307.95,813.03 h25.5
  text "v12" at 840,780 h27.2 r90

## Silkscreen, mask and mechanical layers (free items; w line width, h text height)
Dimension:
  lines w1.97: 0,181.1 ccw(c24.3,181.78) 23.62,157.48 ; 842.52,157.48 ccw(c841.84,181.78) 866.14,181.1
  lines w4: 0,181.1 ccw(c24.3,181.78) 23.62,157.48 cw(c22.01,137.22) 42.32,137.8 42.32,0 512.8,0 512.8,114.17 cw(c536.42,114.17) 560.04,114.17 560.04,0 823.82,0 823.82,137.8 cw(c843.92,137.43) 842.52,157.48 ccw(c841.84,181.78) 866.14,181.1 866.14,826.77 ccw(c825.79,825.79) 826.77,866.14 661.42,866.14 cw(c592.52,866.14) 592.52,797.24 cw(c592.52,866.14) 523.62,866.14 39.37,866.14 ccw(c40.35,825.79) 0,826.77 0,181.1
tDocu:
  text "0.8mm PCB" at 1244.88,1511.85 h59.5
  text "45 degree chamfered edge" at 1244.88,1406.85 h59.5
  text "Four layer design" at 1244.88,1301.85 h59.5
  text "ENIG Finish" at 1244.88,1196.85 h59.5
  text "Elias Santistevan" at 910,-555 h59.5

## Dimensions
866.14,826.77 to 0,826.77 on tFinish
823.82,0 to 826.77,866.14 on tFinish
823.82,0 to 560.04,0 on tFinish
512.8,0 to 42.32,0 on tFinish

## Text inside footprints (layer, text, board x,y; h text height)
FRAME2: tDocu "Designed by:" at 150,-550 h59.5; tDocu "https://creativecommons.org/licenses/by-sa/4.0/" at -300,-450 h59.5; tDocu "Released under the Creative Commons Attribution Share-Alike 4.0 License" at -1100,-350 h59.5
J2: Dimension "Out" at 592.48,829.72 h18.31; Dimension "Route" at 592.48,847.44 h18.31; Measures "2222" at 435,826.77 h18.31 r180; Milling "0.8mm PCB" at 434.21,-89.37 h46.5 r180; Milling "Chamfered Edge" at 434.21,-39.37 h46.5 r180
LOGO5: tDocu "(Add these comments when uploading gerbers.)" at 1250,1750 h59.5; tDocu "Ordering Instructions:" at 1250,1950 h102